# Altium PCB 02-00037-000.PcbDoc (part 1 of 2)
Units mm, origin at the board's own origin, x right, y up, seen from the top; angles counter-clockwise.
Board outline 55.7 x 52.44 mm, 2 copper layers (L1_TOP, L2_BOTTOM), stack 0.71 mm thick; 73 components, 59 nets, 225 pads, 11 vias.
Unrouted connection lines stored in the file: 130.
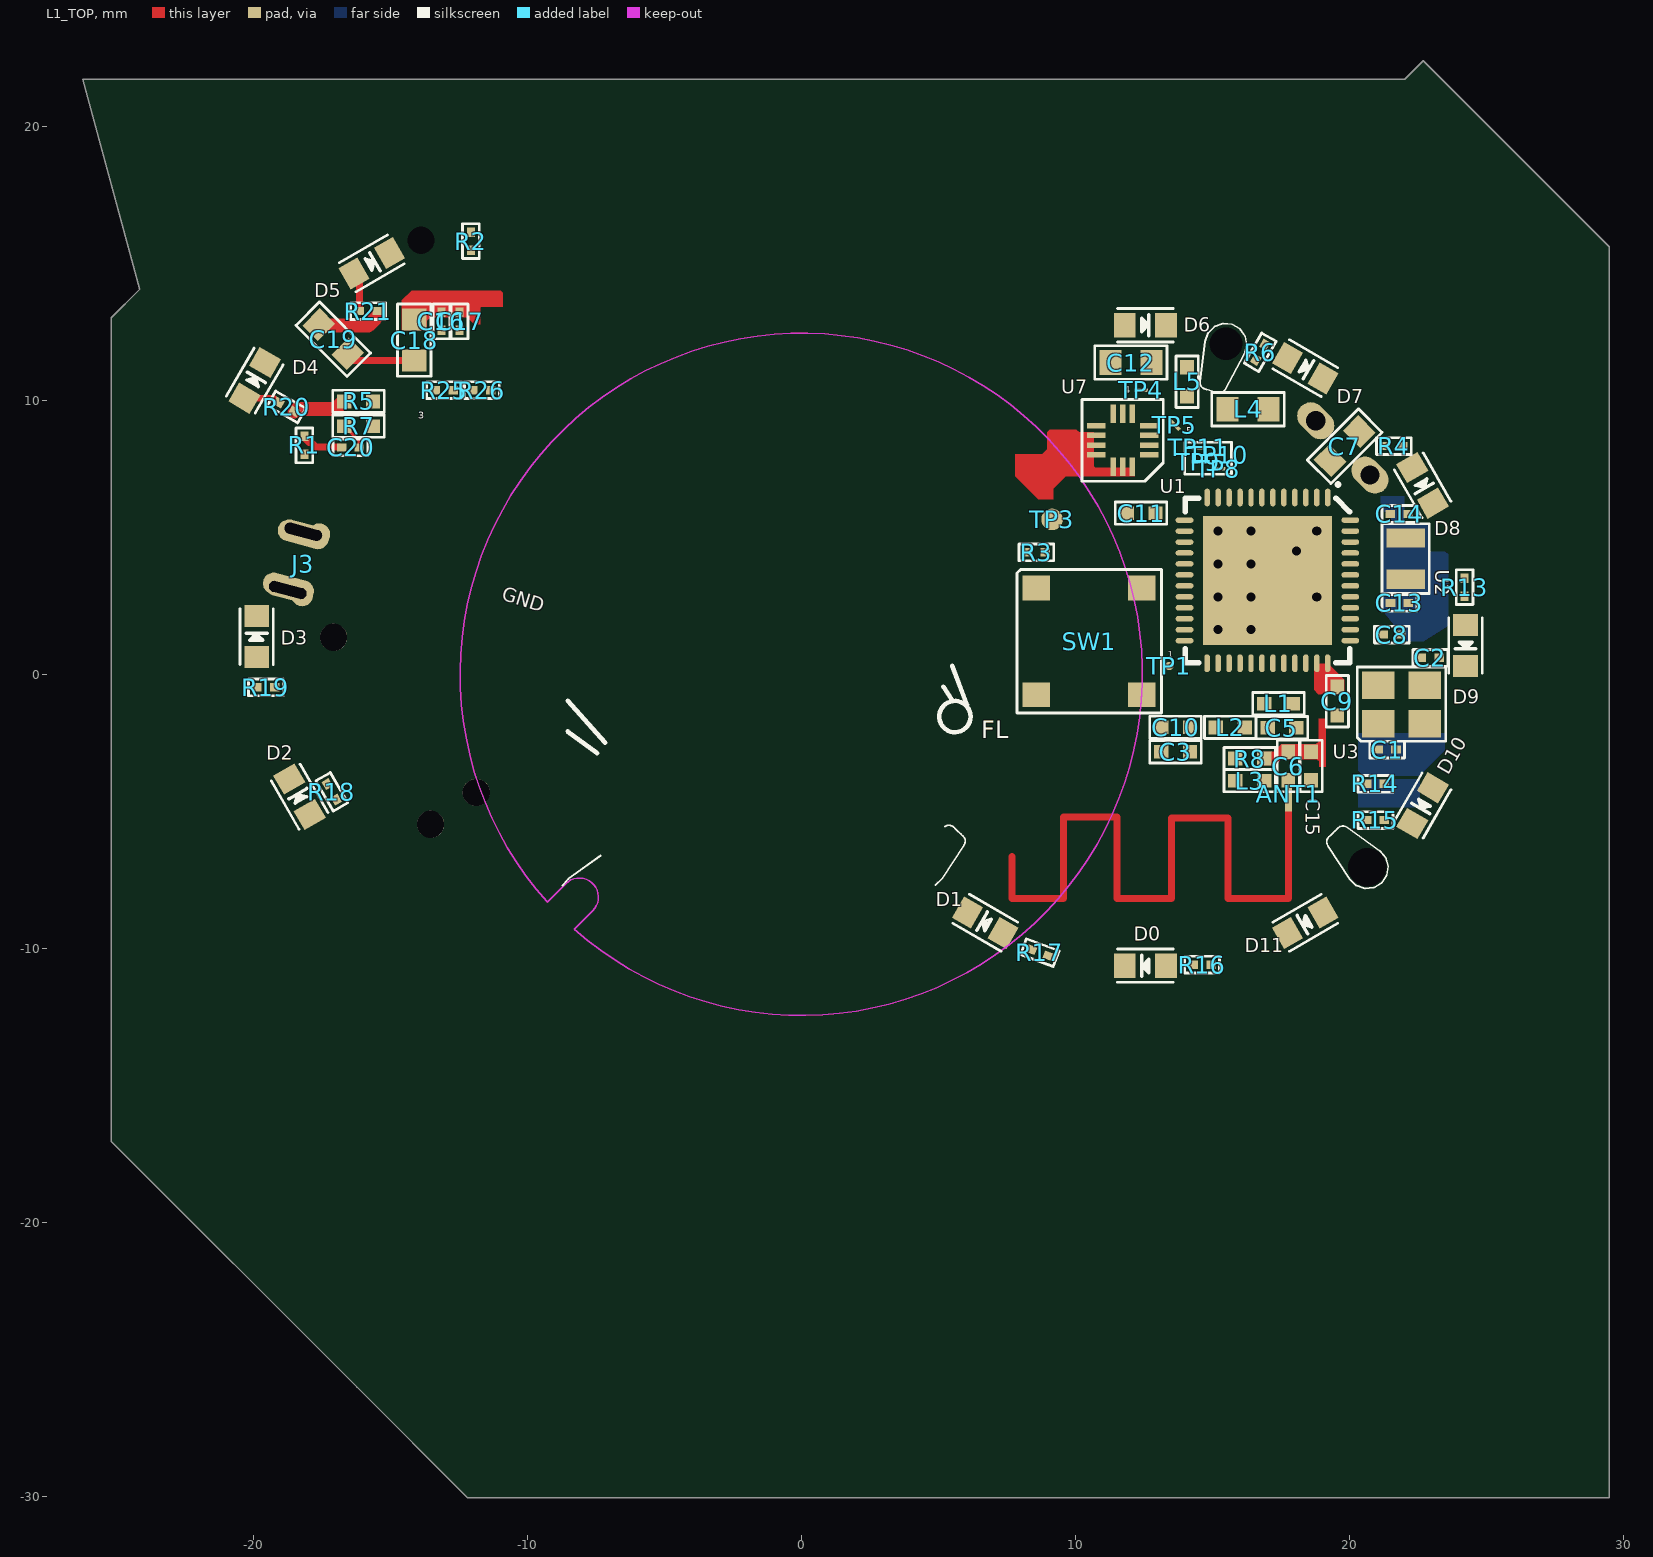
[diagram p0: L1_TOP view]
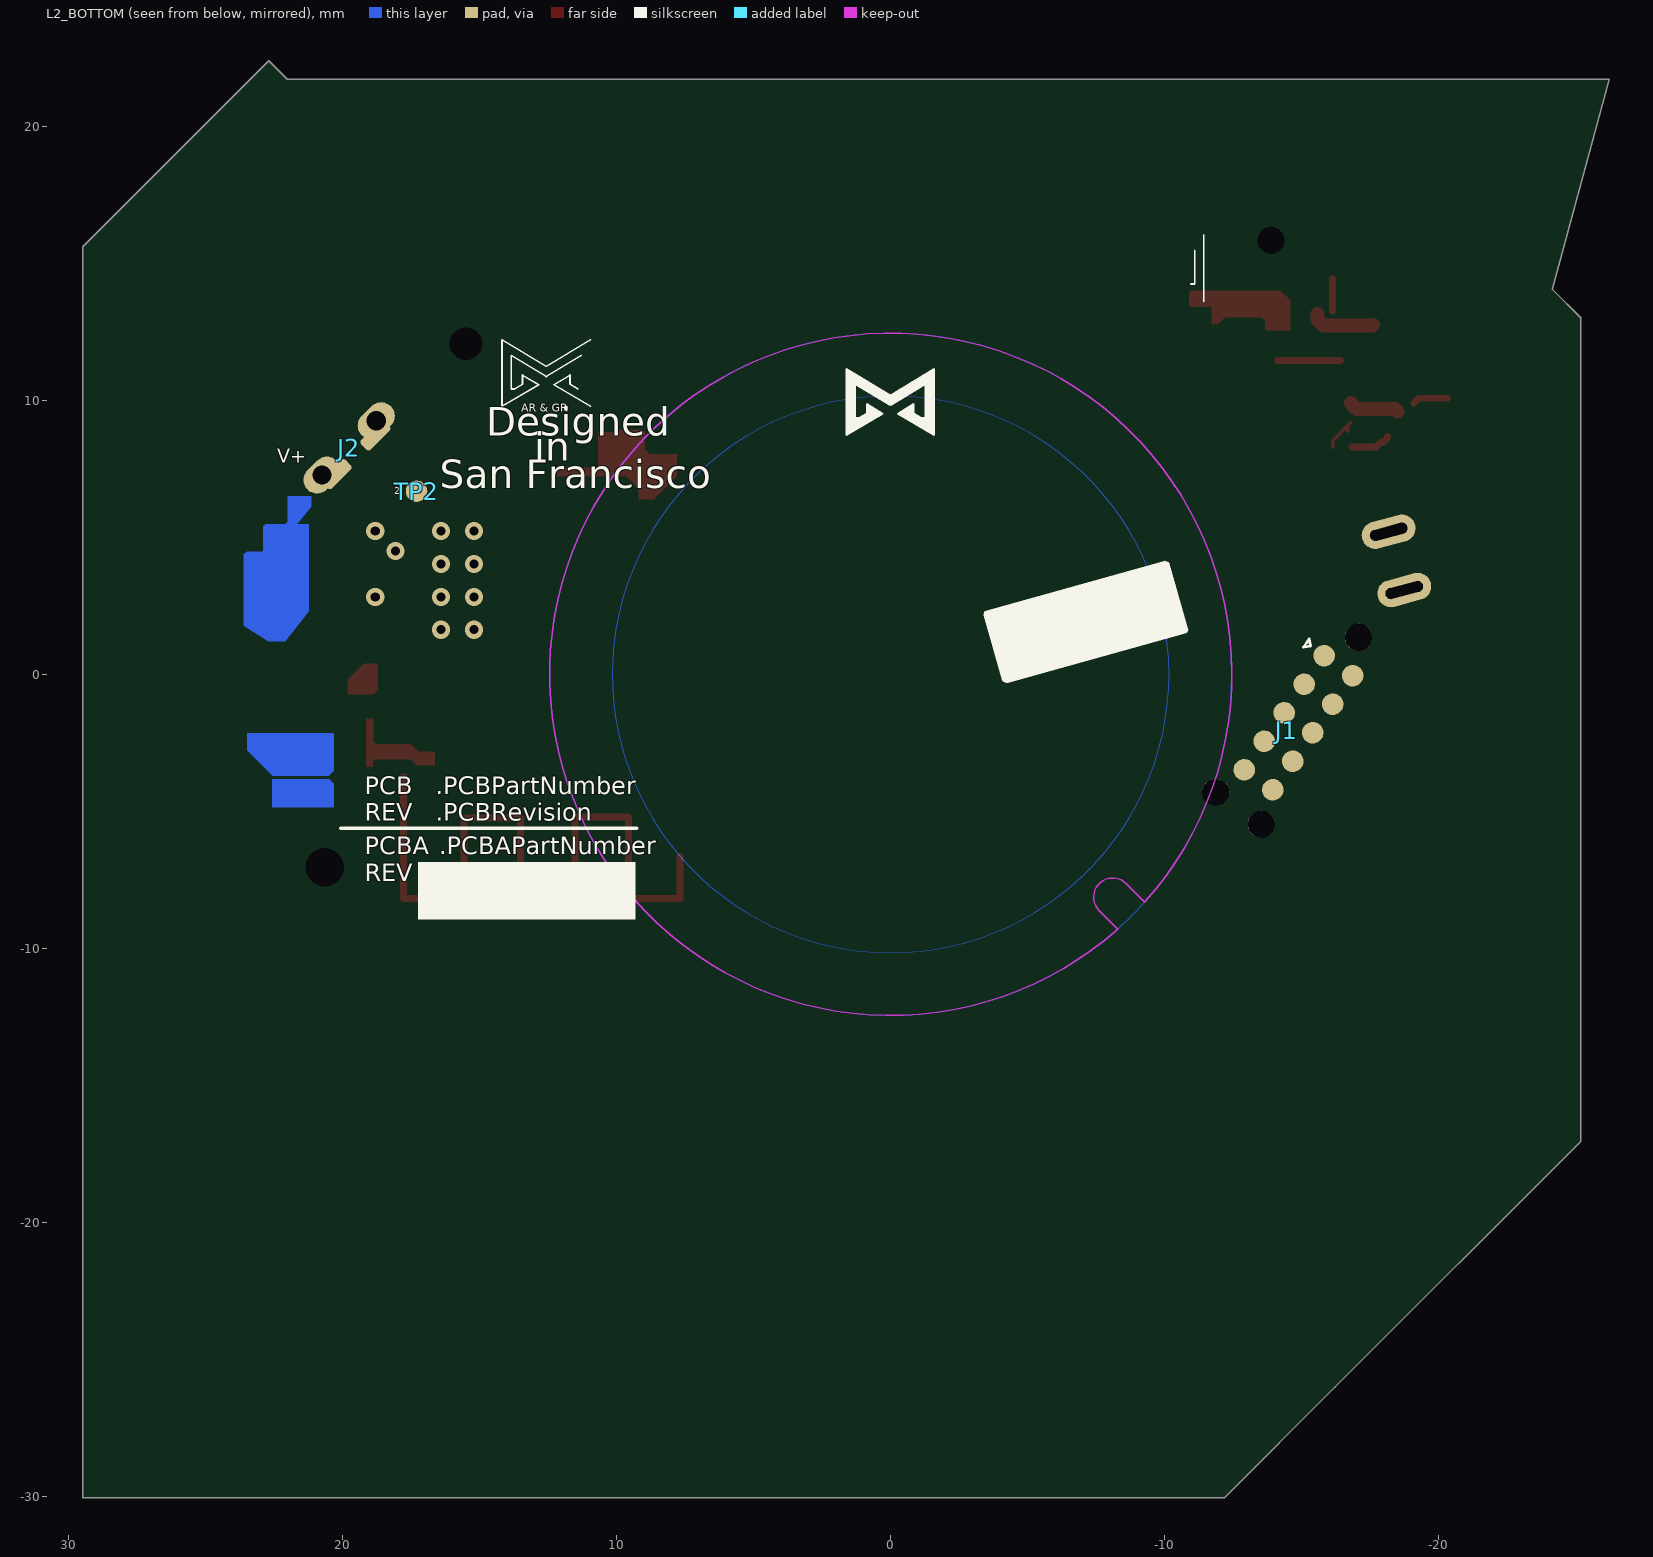
[diagram p1: L2_BOTTOM view, seen from below]

## Layer stack, top to bottom
L1_TOP: signal copper 0.0175
Dielectric: core 0.675, FR-4, Dk 4.3
L2_BOTTOM: signal copper 0.0175

## Board outline
-24.149,14.046 -25.184,13.011 -25.184,-11.189 -25.184,-17.043 -16.218,-26.01 -12.173,-30.055 29.483,-30.055 29.483,15.602 22.695,22.39 22.022,21.717 -26.219,21.717

## Design rules (kind name [scope] priority, off if disabled: settings)
Clearance "Custom Polygon Clearance" [InPolygon] p1: gap=0.127
Clearance "Via and Pad" [IsSMTPin vs IsVia] p2 off: gap=0.127
Clearance NetTieClearance [IsNetTieComponent] p3: gap=0.127
Clearance Polygon [InNamedPolygon('L1_TOP-GND') OR InNamedPolygon('L3_POWER-GND') or InNamedPolygon('L4_BOTTOM-GND')or InNamedPolygon('BUCK_OUT')] p4: gap=0.178
Clearance "'Default' PADS rule_24" [IsSMTPin vs IsSMTPin] p5: gap=0.152
Clearance "'Default' PADS rule_23" [IsThruPin vs IsSMTPin] p6: gap=0.152
Clearance "'Default' PADS rule_22" [IsSMTPin vs IsThruPin] p7: gap=0.152
Clearance "'Default' PADS rule_1" [IsVia vs IsSMTPin] p8: gap=0.127
Clearance "'Default' PADS rule_20" [IsSMTPin vs IsVia] p9: gap=0.102
Clearance "'Default' PADS rule_18" [IsThruPin vs IsThruPin] p10: gap=0.152
Clearance "'Default' PADS rule_17" [IsVia vs IsThruPin] p11: gap=0.152
Clearance "'Default' PADS rule_16" [IsThruPin vs IsVia] p12: gap=0.152
Clearance "BGA Escape" [IsSMTPin] p13: gap=0.127
Clearance "Via Trace Clearance" [IsVia] p14: gap=0.127
Clearance "'Default' PADS rule_15" [All] p15: gap=0.127
ComponentClearance "'Default' PADS rule_12" [All] p1: gap=0 collisioncheckmode=3 verticalgap=0.254 showdistances=FALSE
FlightTimeFalling "'Default' PADS rule_10" [All] p1: maximum=10.00
FlightTimeRising "'Default' PADS rule_9" [All] p1: maximum=10.00
Length "'Default' PADS rule_5" [All] p1: maxlimit=1270 minlimit=0
MaxMinImpedance "'Default' PADS rule_8" [All] p1: minimum=50.00 maximum=150.0
MinimumSolderMaskSliver [All] p1: minsoldermaskwidth=0.051
ParallelSegment "'Default' PADS rule_7" [All] p1: limit=25.4 gap=5.08
ParallelSegment "'Default' PADS rule_6" [All] p2: limit=25.4 gap=5.08
PlaneClearance "'Default' PADS rule_14" [All] p1: clearance=0.15
PlaneConnect "Through Pin Connect" [IsThruPin] p1: planeconnectstyle=Relief reliefexpansion=0.254 reliefentries=4 reliefconductorwidth=0.508 reliefairgap=0.254
PlaneConnect "Power Plane Connect Style - Via from round thru-hole global defaults" [IsVia] p2: planeconnectstyle=Direct reliefexpansion=0.508 reliefentries=4 reliefconductorwidth=0.381 reliefairgap=0.254
PlaneConnect "Power Plane Connect Style - Round thru-hole pad from global defaults" [IsPad And OnMultiLayer And (PadShape_MidLayer1 = 'Round') And (PadXSize_MidLayer1 = PadYSize_MidLayer1)] p3: planeconnectstyle=Direct reliefexpansion=0.508 reliefentries=4 reliefconductorwidth=0.381 reliefairgap=0.254
PlaneConnect "Power Plane Connect Style - Square thru-hole pad from global defaults" [IsPad And OnMultiLayer And ((PadShape_MidLayer1 = 'Rectangular') Or (PadShape_MidLayer1 = 'Octagonal') Or (PadShape_MidLayer1 = 'Rounded Rectangle')) And (PadXSize_MidLayer1 = PadYSize_MidLayer1)] p4: planeconnectstyle=Direct reliefexpansion=0.508 reliefentries=4 reliefconductorwidth=0.381 reliefairgap=0.254
PlaneConnect "Power Plane Connect Style - Rect thru-hole pad from global defaults" [IsPad And OnMultiLayer And ((PadShape_MidLayer1 = 'Rectangular') Or (PadShape_MidLayer1 = 'Octagonal') Or (PadShape_MidLayer1 = 'Rounded Rectangle')) And (PadXSize_MidLayer1 <> PadYSize_MidLayer1)] p5: planeconnectstyle=Direct reliefexpansion=0.508 reliefentries=4 reliefconductorwidth=0.381 reliefairgap=0.254
PlaneConnect "Power Plane Connect Style - Square-rect thru-hole pad from global defaults" [IsPad And OnMultiLayer And (PadShape_MidLayer1 = 'Rounded Rectangle') And (PadXSize_MidLayer1 = PadYSize_MidLayer1) And (Pad_CornerRadius_MidLayer1 = '0%')] p6: planeconnectstyle=Direct reliefexpansion=0.508 reliefentries=4 reliefconductorwidth=0.381 reliefairgap=0.254
PlaneConnect "Power Plane Connect Style - Oval thru-hole pad from global defaults" [IsPad And OnMultiLayer And (PadShape_MidLayer1 = 'Round') And (PadXSize_MidLayer1 <> PadYSize_MidLayer1)] p7: planeconnectstyle=Direct reliefexpansion=0.508 reliefentries=4 reliefconductorwidth=0.381 reliefairgap=0.254
PlaneConnect "Power Plane Connect Style - Round-oval thru-hole pad from global defaults" [IsPad And OnMultiLayer And (PadShape_MidLayer1 = 'Rounded Rectangle') And (PadXSize_MidLayer1 = PadYSize_MidLayer1) And (Pad_CornerRadius_MidLayer1 = '100%')] p8: planeconnectstyle=Direct reliefexpansion=0.508 reliefentries=4 reliefconductorwidth=0.381 reliefairgap=0.254
PolygonConnect PolygonConnect_1 [IsThruPin] p1: connectstyle=Relief reliefconductorwidth=0.254 reliefentries=4 polygonreliefangle="45 Angle" airgapwidth=0.254
PolygonConnect "Polygon Connect Style - L4_BOTTOM Round SMD from global defaults" [IsSMTPin And (PadShape_BottomLayer = 'Round') And (PadXSize_BottomLayer = PADYSize_BottomLayer) vs Layer = 'L4_BOTTOM'] p2: connectstyle=Direct reliefconductorwidth=0.381 reliefentries=4 polygonreliefangle="45 Angle" airgapwidth=0.254
PolygonConnect "Polygon Connect Style - L1_TOP Round SMD from global defaults" [IsSMTPin And (PadShape_TopLayer = 'Round') And (PadXSize_TopLayer = PADYSize_TopLayer) vs Layer = 'L1_TOP'] p3: connectstyle=Direct reliefconductorwidth=0.381 reliefentries=4 polygonreliefangle="45 Angle" airgapwidth=0.254
PolygonConnect "Polygon Connect Style - L4_BOTTOM Square SMD from global defaults 1" [IsSMTPin And (PadShape_BottomLayer = 'Rectangular') And (PadXSize_BottomLayer = PADYSize_BottomLayer) vs Layer = 'L4_BOTTOM'] p4: connectstyle=Direct reliefconductorwidth=0.381 reliefentries=4 polygonreliefangle="45 Angle" airgapwidth=0.254
PolygonConnect "Polygon Connect Style - L4_BOTTOM Square SMD from global defaults 2" [IsSMTPin And (PadShape_BottomLayer = 'Octagonal') And (PadXSize_BottomLayer = PADYSize_BottomLayer) vs Layer = 'L4_BOTTOM'] p5: connectstyle=Direct reliefconductorwidth=0.381 reliefentries=4 polygonreliefangle="45 Angle" airgapwidth=0.254
PolygonConnect "Polygon Connect Style - L4_BOTTOM Square SMD from global defaults 3" [IsSMTPin And (PadShape_BottomLayer = 'Rounded Rectangle') And (PadXSize_BottomLayer = PADYSize_BottomLayer) vs Layer = 'L4_BOTTOM'] p6: connectstyle=Direct reliefconductorwidth=0.381 reliefentries=4 polygonreliefangle="45 Angle" airgapwidth=0.254
PolygonConnect "Polygon Connect Style - L1_TOP Square SMD from global defaults 1" [IsSMTPin And (PadShape_TopLayer = 'Rectangular') And (PadXSize_TopLayer = PADYSize_TopLayer) vs Layer = 'L1_TOP'] p7: connectstyle=Direct reliefconductorwidth=0.381 reliefentries=4 polygonreliefangle="45 Angle" airgapwidth=0.254
PolygonConnect "Polygon Connect Style - L1_TOP Square SMD from global defaults 2" [IsSMTPin And (PadShape_TopLayer = 'Octagonal') And (PadXSize_TopLayer = PADYSize_TopLayer) vs Layer = 'L1_TOP'] p8: connectstyle=Direct reliefconductorwidth=0.381 reliefentries=4 polygonreliefangle="45 Angle" airgapwidth=0.254
PolygonConnect "Polygon Connect Style - L1_TOP Square SMD from global defaults 3" [IsSMTPin And (PadShape_TopLayer = 'Rounded Rectangle') And (PadXSize_TopLayer = PADYSize_TopLayer) vs Layer = 'L1_TOP'] p9: connectstyle=Direct reliefconductorwidth=0.381 reliefentries=4 polygonreliefangle="45 Angle" airgapwidth=0.254
PolygonConnect "Polygon Connect Style - L4_BOTTOM Rect SMD from global defaults 1" [IsSMTPin And (PadShape_BottomLayer = 'Rectangular') And (PadXSize_BottomLayer <> PADYSize_BottomLayer) vs Layer = 'L4_BOTTOM'] p10: connectstyle=Direct reliefconductorwidth=0.381 reliefentries=4 polygonreliefangle="45 Angle" airgapwidth=0.254
PolygonConnect "Polygon Connect Style - L4_BOTTOM Rect SMD from global defaults 2" [IsSMTPin And (PadShape_BottomLayer = 'Octagonal') And (PadXSize_BottomLayer <> PADYSize_BottomLayer) vs Layer = 'L4_BOTTOM'] p11: connectstyle=Direct reliefconductorwidth=0.381 reliefentries=4 polygonreliefangle="45 Angle" airgapwidth=0.254
PolygonConnect "Polygon Connect Style - L4_BOTTOM Rect SMD from global defaults 3" [IsSMTPin And (PadShape_BottomLayer = 'Rounded Rectangle') And (PadXSize_BottomLayer <> PADYSize_BottomLayer) vs Layer = 'L4_BOTTOM'] p12: connectstyle=Direct reliefconductorwidth=0.381 reliefentries=4 polygonreliefangle="45 Angle" airgapwidth=0.254
PolygonConnect "Polygon Connect Style - L4_BOTTOM Square-rect SMD pad from global defaults" [IsSMTPin And (PadShape_BottomLayer = 'Rounded Rectangle') And (PadXSize_BottomLayer = PADYSize_BottomLayer) And (Pad_CornerRadius_BottomLayer = '0%') vs Layer = 'L4_BOTTOM'] p13: connectstyle=Direct reliefconductorwidth=0.381 reliefentries=4 polygonreliefangle="45 Angle" airgapwidth=0.254
PolygonConnect "Polygon Connect Style - L1_TOP Rect SMD from global defaults 1" [IsSMTPin And (PadShape_TopLayer = 'Rectangular') And (PadXSize_TopLayer <> PADYSize_TopLayer) vs Layer = 'L1_TOP'] p14: connectstyle=Relief reliefconductorwidth=0.127 reliefentries=4 polygonreliefangle="90 Angle" airgapwidth=0.127
PolygonConnect "Polygon Connect Style - L1_TOP Rect SMD from global defaults 2" [IsSMTPin And (PadShape_TopLayer = 'Octagonal') And (PadXSize_TopLayer <> PADYSize_TopLayer) vs Layer = 'L1_TOP'] p15: connectstyle=Direct reliefconductorwidth=0.381 reliefentries=4 polygonreliefangle="45 Angle" airgapwidth=0.254
PolygonConnect "Polygon Connect Style - L1_TOP Rect SMD from global defaults 3" [IsSMTPin And (PadShape_TopLayer = 'Rounded Rectangle') And (PadXSize_TopLayer <> PADYSize_TopLayer) vs Layer = 'L1_TOP'] p16: connectstyle=Direct reliefconductorwidth=0.381 reliefentries=4 polygonreliefangle="45 Angle" airgapwidth=0.254
PolygonConnect "Polygon Connect Style - L1_TOP Square-rect SMD pad from global defaults" [IsSMTPin And (PadShape_TopLayer = 'Rounded Rectangle') And (PadXSize_TopLayer = PADYSize_TopLayer) And (Pad_CornerRadius_TopLayer = '0%') vs Layer = 'L1_TOP'] p17: connectstyle=Direct reliefconductorwidth=0.381 reliefentries=4 polygonreliefangle="45 Angle" airgapwidth=0.254
PolygonConnect "Polygon Connect Style - L4_BOTTOM Oval SMD from global defaults" [IsSMTPin And (PadShape_BottomLayer = 'Round') And (PadXSize_BottomLayer <> PADYSize_BottomLayer) vs Layer = 'L4_BOTTOM'] p18: connectstyle=Direct reliefconductorwidth=0.381 reliefentries=4 polygonreliefangle="45 Angle" airgapwidth=0.254
PolygonConnect "Polygon Connect Style - L4_BOTTOM Round-oval SMD pad from global defaults" [IsSMTPin And (PadShape_BottomLayer = 'Rounded Rectangle') And (PadXSize_BottomLayer = PADYSize_BottomLayer) And (Pad_CornerRadius_BottomLayer = '100%') vs Layer = 'L4_BOTTOM'] p19: connectstyle=Direct reliefconductorwidth=0.381 reliefentries=4 polygonreliefangle="45 Angle" airgapwidth=0.254
PolygonConnect "Polygon Connect Style - L1_TOP Oval SMD from global defaults" [IsSMTPin And (PadShape_TopLayer = 'Round') And (PadXSize_TopLayer <> PADYSize_TopLayer) vs Layer = 'L1_TOP'] p20: connectstyle=Direct reliefconductorwidth=0.381 reliefentries=4 polygonreliefangle="45 Angle" airgapwidth=0.254
PolygonConnect "Polygon Connect Style - L1_TOP Round-oval SMD pad from global defaults" [IsSMTPin And (PadShape_TopLayer = 'Rounded Rectangle') And (PadXSize_TopLayer = PADYSize_TopLayer) And (Pad_CornerRadius_TopLayer = '100%') vs Layer = 'L1_TOP'] p21: connectstyle=Direct reliefconductorwidth=0.381 reliefentries=4 polygonreliefangle="45 Angle" airgapwidth=0.254
PolygonConnect "Polygon Connect Style - Via from round thru-hole global defaults_28" [IsVia] p22: connectstyle=Direct reliefconductorwidth=0.381 reliefentries=4 polygonreliefangle="45 Angle" airgapwidth=0.254
PolygonConnect "Polygon Connect Style - L4_BOTTOM Round thru-hole pad from global defaults" [IsPad And OnMultiLayer And (PadShape_BottomLayer = 'Round') And (PadXSize_BottomLayer = PADYSize_BottomLayer) vs Layer = 'L4_BOTTOM'] p23: connectstyle=Direct reliefconductorwidth=0.381 reliefentries=4 polygonreliefangle="45 Angle" airgapwidth=0.254
PolygonConnect "Polygon Connect Style - Via from round thru-hole global defaults_27" [IsVia] p24: connectstyle=Direct reliefconductorwidth=0.381 reliefentries=4 polygonreliefangle="45 Angle" airgapwidth=0.254
PolygonConnect "Polygon Connect Style - L3_POWER Round thru-hole pad from global defaults" [IsPad And OnMultiLayer And (PadShape_MidLayer2 = 'Round') And (PadXSize_MidLayer2 = PADYSize_MidLayer2) vs Layer = 'L3_POWER'] p25: connectstyle=Direct reliefconductorwidth=0.381 reliefentries=4 polygonreliefangle="45 Angle" airgapwidth=0.254
PolygonConnect "Polygon Connect Style - Via from round thru-hole global defaults_26" [IsVia] p26: connectstyle=Direct reliefconductorwidth=0.381 reliefentries=4 polygonreliefangle="45 Angle" airgapwidth=0.254
PolygonConnect "Polygon Connect Style - L2_GND Round thru-hole pad from global defaults" [IsPad And OnMultiLayer And (PadShape_MidLayer1 = 'Round') And (PadXSize_MidLayer1 = PADYSize_MidLayer1) vs Layer = 'L2_GND'] p27: connectstyle=Direct reliefconductorwidth=0.381 reliefentries=4 polygonreliefangle="45 Angle" airgapwidth=0.254
PolygonConnect "Polygon Connect Style - Via from round thru-hole global defaults" [IsVia] p28: connectstyle=Direct reliefconductorwidth=0.381 reliefentries=4 polygonreliefangle="45 Angle" airgapwidth=0.254
PolygonConnect "Polygon Connect Style - L1_TOP Round thru-hole pad from global defaults" [IsPad And OnMultiLayer And (PadShape_TopLayer = 'Round') And (PadXSize_TopLayer = PADYSize_TopLayer) vs Layer = 'L1_TOP'] p29: connectstyle=Direct reliefconductorwidth=0.381 reliefentries=4 polygonreliefangle="45 Angle" airgapwidth=0.254
PolygonConnect "Polygon Connect Style - L4_BOTTOM Square thru-hole pad from global defaults" [IsPad And OnMultiLayer And ((PadShape_BottomLayer = 'Rectangular') Or (PadShape_BottomLayer = 'Octagonal') Or (PadShape_BottomLayer = 'Rounded Rectangle')) And (PadXSize_BottomLayer = PADYSize_BottomLayer) vs Layer = 'L4_BOTTOM'] p30: connectstyle=Direct reliefconductorwidth=0.381 reliefentries=4 polygonreliefangle="45 Angle" airgapwidth=0.254
PolygonConnect "Polygon Connect Style - L3_POWER Square thru-hole pad from global defaults" [IsPad And OnMultiLayer And ((PadShape_MidLayer2 = 'Rectangular') Or (PadShape_MidLayer2 = 'Octagonal') Or (PadShape_MidLayer2 = 'Rounded Rectangle')) And (PadXSize_MidLayer2 = PADYSize_MidLayer2) vs Layer = 'L3_POWER'] p31: connectstyle=Direct reliefconductorwidth=0.381 reliefentries=4 polygonreliefangle="45 Angle" airgapwidth=0.254
PolygonConnect "Polygon Connect Style - L2_GND Square thru-hole pad from global defaults" [IsPad And OnMultiLayer And ((PadShape_MidLayer1 = 'Rectangular') Or (PadShape_MidLayer1 = 'Octagonal') Or (PadShape_MidLayer1 = 'Rounded Rectangle')) And (PadXSize_MidLayer1 = PADYSize_MidLayer1) vs Layer = 'L2_GND'] p32: connectstyle=Direct reliefconductorwidth=0.381 reliefentries=4 polygonreliefangle="45 Angle" airgapwidth=0.254
PolygonConnect "Polygon Connect Style - L1_TOP Square thru-hole pad from global defaults" [IsPad And OnMultiLayer And ((PadShape_TopLayer = 'Rectangular') Or (PadShape_TopLayer = 'Octagonal') Or (PadShape_TopLayer = 'Rounded Rectangle')) And (PadXSize_TopLayer = PADYSize_TopLayer) vs Layer = 'L1_TOP'] p33: connectstyle=Direct reliefconductorwidth=0.381 reliefentries=4 polygonreliefangle="45 Angle" airgapwidth=0.254
PolygonConnect "Polygon Connect Style - L4_BOTTOM Rect thru-hole pad from global defaults" [IsPad And OnMultiLayer And ((PadShape_BottomLayer = 'Rectangular') Or (PadShape_BottomLayer = 'Octagonal') Or (PadShape_BottomLayer = 'Rounded Rectangle')) And (PadXSize_BottomLayer <> PADYSize_BottomLayer) vs Layer = 'L4_BOTTOM'] p34: connectstyle=Direct reliefconductorwidth=0.381 reliefentries=4 polygonreliefangle="45 Angle" airgapwidth=0.254
PolygonConnect "Polygon Connect Style - L4_BOTTOM Square-rect thru-hole pad from global defaults" [IsPad And OnMultiLayer And (PadShape_BottomLayer = 'Rounded Rectangle') And (PadXSize_BottomLayer = PADYSize_BottomLayer) And (Pad_CornerRadius_BottomLayer = '0%') vs Layer = 'L4_BOTTOM'] p35: connectstyle=Direct reliefconductorwidth=0.381 reliefentries=4 polygonreliefangle="45 Angle" airgapwidth=0.254
PolygonConnect "Polygon Connect Style - L3_POWER Rect thru-hole pad from global defaults" [IsPad And OnMultiLayer And ((PadShape_MidLayer2 = 'Rectangular') Or (PadShape_MidLayer2 = 'Octagonal') Or (PadShape_MidLayer2 = 'Rounded Rectangle')) And (PadXSize_MidLayer2 <> PADYSize_MidLayer2) vs Layer = 'L3_POWER'] p36: connectstyle=Direct reliefconductorwidth=0.381 reliefentries=4 polygonreliefangle="45 Angle" airgapwidth=0.254
PolygonConnect "Polygon Connect Style - L3_POWER Square-rect thru-hole pad from global defaults" [IsPad And OnMultiLayer And (PadShape_MidLayer2 = 'Rounded Rectangle') And (PadXSize_MidLayer2 = PADYSize_MidLayer2) And (Pad_CornerRadius_MidLayer2 = '0%') vs Layer = 'L3_POWER'] p37: connectstyle=Direct reliefconductorwidth=0.381 reliefentries=4 polygonreliefangle="45 Angle" airgapwidth=0.254
PolygonConnect "Polygon Connect Style - L2_GND Rect thru-hole pad from global defaults" [IsPad And OnMultiLayer And ((PadShape_MidLayer1 = 'Rectangular') Or (PadShape_MidLayer1 = 'Octagonal') Or (PadShape_MidLayer1 = 'Rounded Rectangle')) And (PadXSize_MidLayer1 <> PADYSize_MidLayer1) vs Layer = 'L2_GND'] p38: connectstyle=Direct reliefconductorwidth=0.381 reliefentries=4 polygonreliefangle="45 Angle" airgapwidth=0.254
PolygonConnect "Polygon Connect Style - L2_GND Square-rect thru-hole pad from global defaults" [IsPad And OnMultiLayer And (PadShape_MidLayer1 = 'Rounded Rectangle') And (PadXSize_MidLayer1 = PADYSize_MidLayer1) And (Pad_CornerRadius_MidLayer1 = '0%') vs Layer = 'L2_GND'] p39: connectstyle=Direct reliefconductorwidth=0.381 reliefentries=4 polygonreliefangle="45 Angle" airgapwidth=0.254
PolygonConnect "Polygon Connect Style - L1_TOP Rect thru-hole pad from global defaults" [IsPad And OnMultiLayer And ((PadShape_TopLayer = 'Rectangular') Or (PadShape_TopLayer = 'Octagonal') Or (PadShape_TopLayer = 'Rounded Rectangle')) And (PadXSize_TopLayer <> PADYSize_TopLayer) vs Layer = 'L1_TOP'] p40: connectstyle=Direct reliefconductorwidth=0.381 reliefentries=4 polygonreliefangle="45 Angle" airgapwidth=0.254
PolygonConnect "Polygon Connect Style - L1_TOP Square-rect thru-hole pad from global defaults" [IsPad And OnMultiLayer And (PadShape_TopLayer = 'Rounded Rectangle') And (PadXSize_TopLayer = PADYSize_TopLayer) And (Pad_CornerRadius_TopLayer = '0%') vs Layer = 'L1_TOP'] p41: connectstyle=Direct reliefconductorwidth=0.381 reliefentries=4 polygonreliefangle="45 Angle" airgapwidth=0.254
PolygonConnect "Polygon Connect Style - L4_BOTTOM Oval thru-hole pad from global defaults" [IsPad And OnMultiLayer And (PadShape_BottomLayer = 'Round') And (PadXSize_BottomLayer <> PADYSize_BottomLayer) vs Layer = 'L4_BOTTOM'] p42: connectstyle=Direct reliefconductorwidth=0.381 reliefentries=4 polygonreliefangle="45 Angle" airgapwidth=0.254
PolygonConnect "Polygon Connect Style - L4_BOTTOM Round-oval thru-hole pad from global defaults" [IsPad And OnMultiLayer And (PadShape_BottomLayer = 'Rounded Rectangle') And (PadXSize_BottomLayer = PADYSize_BottomLayer) And (Pad_CornerRadius_BottomLayer = '100%') vs Layer = 'L4_BOTTOM'] p43: connectstyle=Direct reliefconductorwidth=0.381 reliefentries=4 polygonreliefangle="45 Angle" airgapwidth=0.254
PolygonConnect "Polygon Connect Style - L3_POWER Oval thru-hole pad from global defaults" [IsPad And OnMultiLayer And (PadShape_MidLayer2 = 'Round') And (PadXSize_MidLayer2 <> PADYSize_MidLayer2) vs Layer = 'L3_POWER'] p44: connectstyle=Direct reliefconductorwidth=0.381 reliefentries=4 polygonreliefangle="45 Angle" airgapwidth=0.254
PolygonConnect "Polygon Connect Style - L3_POWER Round-oval thru-hole pad from global defaults" [IsPad And OnMultiLayer And (PadShape_MidLayer2 = 'Rounded Rectangle') And (PadXSize_MidLayer2 = PADYSize_MidLayer2) And (Pad_CornerRadius_MidLayer2 = '100%') vs Layer = 'L3_POWER'] p45: connectstyle=Direct reliefconductorwidth=0.381 reliefentries=4 polygonreliefangle="45 Angle" airgapwidth=0.254
PolygonConnect "Polygon Connect Style - L2_GND Oval thru-hole pad from global defaults" [IsPad And OnMultiLayer And (PadShape_MidLayer1 = 'Round') And (PadXSize_MidLayer1 <> PADYSize_MidLayer1) vs Layer = 'L2_GND'] p46: connectstyle=Direct reliefconductorwidth=0.381 reliefentries=4 polygonreliefangle="45 Angle" airgapwidth=0.254
PolygonConnect "Polygon Connect Style - L2_GND Round-oval thru-hole pad from global defaults" [IsPad And OnMultiLayer And (PadShape_MidLayer1 = 'Rounded Rectangle') And (PadXSize_MidLayer1 = PADYSize_MidLayer1) And (Pad_CornerRadius_MidLayer1 = '100%') vs Layer = 'L2_GND'] p47: connectstyle=Direct reliefconductorwidth=0.381 reliefentries=4 polygonreliefangle="45 Angle" airgapwidth=0.254
PolygonConnect "Polygon Connect Style - L1_TOP Oval thru-hole pad from global defaults" [IsPad And OnMultiLayer And (PadShape_TopLayer = 'Round') And (PadXSize_TopLayer <> PADYSize_TopLayer) vs Layer = 'L1_TOP'] p48: connectstyle=Direct reliefconductorwidth=0.381 reliefentries=4 polygonreliefangle="45 Angle" airgapwidth=0.254
PolygonConnect "Polygon Connect Style - L1_TOP Round-oval thru-hole pad from global defaults" [IsPad And OnMultiLayer And (PadShape_TopLayer = 'Rounded Rectangle') And (PadXSize_TopLayer = PADYSize_TopLayer) And (Pad_CornerRadius_TopLayer = '100%') vs Layer = 'L1_TOP'] p49: connectstyle=Direct reliefconductorwidth=0.381 reliefentries=4 polygonreliefangle="45 Angle" airgapwidth=0.254
PolygonConnect [All] p50: connectstyle=Relief reliefconductorwidth=0.254 reliefentries=4 polygonreliefangle="90 Angle" airgapwidth=0.254
RoutingLayers "'Default' PADS rule_3" [All] p1: top layer_v5=TRUE bottom layer_v5=TRUE
RoutingPriority "'Default' PADS rule_2" [All] p1: routingpriority=3
RoutingTopology "'Default' PADS rule" [All] p1: topology=Shortest
RoutingVias "'Default' PADS rule_4" [All] p1: holewidth=0.152 width=0.356 viastyle="Through Hole" minholewidth=0.102 minwidth=0.305 maxholewidth=0.508 maxwidth=0.61
SilkscreenOverComponentPads [All] p1: minsilkscreentomaskgap=0.051
SolderMaskExpansion "Solder Mask Expansion from CAM settings" [All] p1: expansion=0.064
Width "'Default' PADS rule_13" [All] p1: maxlimit=0.5 minlimit=0.075 preferedwidth=0.127
20 further rules are at their usual default settings.

## Classes and differential pairs
component class POWER: C19 J2 J3
component class SoC: ANT1 C1 C2 C3 C5 C6 C7 C8 C9 C10 C11 C12 C13 C14 C15 C20 L1 L2 L3 L4 L5 R1 R3 R5 R7 R8 R25 R26 SW1 TP1 TP2 TP3 U1 U2 U3
component class ACCEL: C16 C17 C18 TP4 TP5 TP8 TP9 TP10 TP11 U7
component class DEBUG_CONN: J1
component class LEDs: D0 D1 D2 D3 D4 D5 D6 D7 D8 D9 D10 D11 R2 R4 R6 R13 R14 R15 R16 R17 R18 R19 R20 R21
net class LED[11..0]: LED0 LED1 LED2 LED3 LED4 LED5 LED6 LED7 LED8 LED9 LED10 LED11

## Components (designator, comment, footprint, x,y, rotation, side; value= is the part's Value field where it differs from the comment)
ANT1 "Trace Antenna based on PCB400003" NORDIC_MEAND 17.034,-6.306 r90 top
C1 "CAP CER 12PF 25V 5% NP0 0201" CAPC0201(0603)_N 21.379,-2.746 r0 top
C2 "CAP CER 12PF 25V 5% NP0 0201" CAPC0201(0603)_N 22.954,0.604 r180 top
C3 "CAP CER 2200PF 50V 10% X7R 0402" CAPC0402(1005)_N 13.659,-2.828 r180 top
C5 "CAP CER 2.2PF 50V NP0 0402" CAPC0402(1005)_N 17.542,-1.946 r0 top
C6 "CAP CER 2.4PF 50V NP0 0402" CAPC0402(1005)_N 17.774,-3.346 r90 top
C7 "CAP CER 4.7UF 6.3V 10% X5R 0603" CAPC0603(1608)_N 19.829,8.329 r225 top
C8 "CAP CER 0.1UF 10V 10% X5R 0201" CAPC0201(0603)_N 21.554,1.454 r180 top
C9 "CAP CER 1000PF 50V 10% X7R 0402" CAPC0402(1005)_N 19.564,-0.978 r270 top
C10 "CAP CER 0.047UF 16V 10% X7R 0402" CAPC0402(1005)_N 13.659,-1.933 r180 top
C11 "CAP CER 0.1UF 16V 10% X7R 0402" CAPC0402(1005)_N 12.402,5.88 r0 top
C12 "CAP CER 1UF 16V 20% X7R 0603" CAPC0603(1608)_N 12.029,11.379 r0 top
C13 "CAP CER 15PF 25V 5% NP0 0201" CAPC0201(0603)_N 21.829,2.604 r180 top
C14 "CAP CER 15PF 25V 5% NP0 0201" CAPC0201(0603)_N 21.825,5.855 r0 top
C15 "CAP CER 0.7PF 50V NP0 0402" CAPC0402(1005)_N 18.604,-3.346 r270 top
C16 "CAP CER 0.1UF 10V 10% X5R 0201" CAPC0201(0603)_N -13.132,12.884 r90 top
C17 "CAP CER 0.1UF 10V 10% X5R 0201" CAPC0201(0603)_N -12.471,12.884 r270 top
C18 "CAP CER 10UF 6.3V 20% X5R 0603" CAPC0603(1608)_N -14.122,12.198 r270 top
C19 "CAP CER 10UF 6.3V 20% X5R 0603" CAPC0603(1608)_N -17.08,12.233 r135 top
C20 "CAP CER 10000PF 10V 10% X7R 0201" CAPC0201(0603)_N -16.45,8.283 r0 top
D0 "THIN LED 1.6X0.8MM 631NM RED 0.4MM" LEDC0603(1608)_N 12.554,-10.63 r180 top locked
D1 "THIN LED 1.6X0.8MM 631NM RED 0.4MM" LEDC0603(1608)_N 6.712,-9.065 r150 top locked
D2 "THIN LED 1.6X0.8MM 631NM RED 0.4MM" LEDC0603(1608)_N -18.31,-4.464 r120 top locked
D3 "THIN LED 1.6X0.8MM 631NM RED 0.4MM" LEDC0603(1608)_N -19.875,1.378 r90 top locked
D4 "THIN LED 1.6X0.8MM 631NM RED 0.4MM" LEDC0603(1608)_N -19.948,10.725 r60 top locked
D5 "THIN LED 1.6X0.8MM 631NM RED 0.4MM" LEDC0603(1608)_N -15.672,15.002 r30 top locked
D6 "THIN LED 1.6X0.8MM 631NM RED 0.4MM" LEDC0603(1608)_N 12.554,12.738 r0 top locked
D7 "THIN LED 1.6X0.8MM 631NM RED 0.4MM" LEDC0603(1608)_N 18.396,11.173 r330 top locked
D8 "THIN LED 1.6X0.8MM 631NM RED 0.4MM" LEDC0603(1608)_N 22.673,6.896 r300 top locked
D9 "THIN LED 1.6X0.8MM 631NM RED 0.4MM" LEDC0603(1608)_N 24.238,1.054 r270 top locked
D10 "THIN LED 1.6X0.8MM 631NM RED 0.4MM" LEDC0603(1608)_N 22.673,-4.788 r240 top locked
D11 "THIN LED 1.6X0.8MM 631NM RED 0.4MM" LEDC0603(1608)_N 18.396,-9.065 r210 top locked
J1 "Tag-Connect 10pin PCB mating contacts - Nordic Rev" TAG_CONNECT_10P -15.817,0.678 r305 bottom locked
J2 "Battery Contact Positive Low Profile" BATT_POS_SPUTNIK 19.764,8.264 r135 bottom locked
J3 "Coin Cell Battery Negative Contact" BATT_NEG -18.741,3.078 r75 bottom locked
L1 "INDUCTOR 4.7NH 160MA 0402" INDC0402(1005)_N 17.414,-1.071 r0 top
L2 "INDUCTOR 10NH 100MA 0402" INDC0402(1005)_N 15.656,-1.937 r0 top
L3 "INDUCTOR 1.5NH 280MA 0402" INDC0402(1005)_N 16.365,-3.88 r0 top
L4 "INDUCTOR 10UH 80MA 10% 0603" INDC0603(1608)_N 16.304,9.674 r0 top
L5 "INDUCTOR HI FREQ 15NH 5% 0402" INDC0402(1005)_N 14.079,10.679 r270 top
R1 "RES 12K OHM 1/20W 1% 0201 SMD" RESC0201(0603)_N -18.13,8.358 r90 top
R2 "RES 270 OHM 1/20W 5% 0201 SMD" RESC0201(0603)_N -12.055,15.808 r90 top
R3 "RES 510 OHM 1/20W 5% 0201 SMD" RESC0201(0603)_N 8.579,4.454 r0 top
R4 "RES 270 OHM 1/20W 5% 0201 SMD" RESC0201(0603)_N 21.624,8.333 r0 top
R5 "RES 1.60M OHM 1/16W 1% 0402 SMD" RESC0402(1005)_N -16.155,9.958 r0 top
R6 "RES 270 OHM 1/20W 5% 0201 SMD" RESC0201(0603)_N 16.754,11.754 r60 top
R7 "RES 1.60M OHM 1/16W 1% 0402 SMD" RESC0402(1005)_N -16.155,9.058 r0 top
R8 "RES 330 OHM 1/16W 5% 0402 SMD" RESC0402(1005)_N 16.369,-3.073 r180 top
R13 "RES 270 OHM 1/20W 5% 0201 SMD" RESC0201(0603)_N 24.204,3.179 r270 top
R14 "RES 270 OHM 1/20W 5% 0201 SMD" RESC0201(0603)_N 20.954,-3.996 r0 top
R15 "RES 270 OHM 1/20W 5% 0201 SMD" RESC0201(0603)_N 20.954,-5.316 r180 top
R16 "RES 270 OHM 1/20W 5% 0201 SMD" RESC0201(0603)_N 14.629,-10.596 r180 top
R17 "RES 270 OHM 1/20W 5% 0201 SMD" RESC0201(0603)_N 8.704,-10.156 r160 top
R18 "RES 270 OHM 1/20W 5% 0201 SMD" RESC0201(0603)_N -17.132,-4.286 r300 top
R19 "RES 270 OHM 1/20W 5% 0201 SMD" RESC0201(0603)_N -19.542,-0.472 r180 top
R20 "RES 270 OHM 1/20W 5% 0201 SMD" RESC0201(0603)_N -18.78,9.758 r150 top
R21 "RES 270 OHM 1/20W 5% 0201 SMD" RESC0201(0603)_N -15.805,13.258 r180 top
R25 "RES 1K OHM 1/20W 5% 0201 SMD" RESC0201(0603)_N -13.03,10.37 r180 top
R26 "RES 1K OHM 1/20W 5% 0201 SMD" RESC0201(0603)_N -11.659,10.37 r180 top
SW1 "SPST Switch 4.5mm" PTS530 10.504,1.204 r0 top locked
TP1 "12MIL SMT Test Point" SMT_TP_12MIL 13.429,0.304 r90 top
TP2 ".767mm SMT Test Point" SMT_TP_p767mm 17.284,6.684 r90 top
TP3 ".767mm SMT Test Point" SMT_TP_P767MM 9.154,5.654 r90 top
TP4 "TEST POINT 5MILx20MIL" SMT_TP_5milx20mil#1 12.402,10.354 r90 top
TP5 "TEST POINT 5MILx20MIL" SMT_TP_5milx20mil#2 13.629,9.104 r180 top
TP8 "TEST POINT 5MILx20MIL" SMT_TP_5milx20mil#3 15.114,7.464 r90 top
TP9 "TEST POINT 5MILx20MIL" SMT_TP_5milx20mil#4 14.394,7.704 r90 top
TP10 "TEST POINT 5MILx20MIL" SMT_TP_5milx20mil#5 15.244,8.01 r90 top
TP11 "TEST POINT 5MILx20MIL" SMT_TP_5milx20mil#6 14.484,8.254 r90 top
U1 "Bluetooth low energy and 2.4GHz proprietary SoC" QFN40P600X600X90-48N 17.012,3.429 r270 top
U2 "32.768kHz 12.5pF 20ppm 80kOhm XTAL" ECX-12 22.053,4.222 r90 top
U3 "CRYSTAL 16MHZ 8PF SMD" NX2520SA 21.904,-1.096 r0 top
U7 "Accelerometer LIS2DHTR" LGA14N 11.734,8.544 r180 top

## Footprints (in the part's own frame and the unit in brackets; to place one, negate y for a bottom-side part, rotate by r counter-clockwise, add the part's x,y. Pads: shape width x height; smd on the part's side, far side on the other; paste and mask are expansions set on the pad)
BATT_NEG [mm]
  round 0.8 smd far side paste-5: 1(-0.051,0.559) 2(2.261,0.584)
  oval 1x2 / inner oval 1x2 / far side oval 0.65x1.6 hole 0.4 slot 1.4 at 90 deg: 1(0,0) 2(2.2,0)
  oval 0.8x1.9 smd far side paste-5: 1(0.102,0) 2(2.108,0.025)
  body extent -0.16,-0.61 2.34,6.74, height 1.1
BATT_POS_SPUTNIK [mm]
  oval 1.5x1 hole 0.7: 1(-1.4,0) 2(1.4,0)
  rrect50% 1.2x0.5 smd paste-99 mask+0.05: 1(-1,-0.354) 2(1,-0.354)
  body extent -1.47,-0.95 1.43,0.5, height 0.2
CAPC0201(0603)_N [mm]
  rect 0.35x0.3 smd: 1(-0.325,0) 2(0.325,0)
  silkscreen extent -0.64,-0.3 0.64,0.3, body extent -0.43,-0.13 0.43,0.13, height 0.23
CAPC0402(1005)_N [mm]
  rect 0.525x0.5 smd: 1(-0.525,0) 2(0.525,0)
  silkscreen extent -0.94,-0.41 0.94,0.41, body extent -0.53,-0.27 0.53,0.28, height 0.35
CAPC0603(1608)_N [mm]
  rect 0.8x0.9 smd: 1(-0.75,0) 2(0.75,0)
  silkscreen extent -1.32,-0.61 1.32,0.61, body extent -0.88,-0.47 0.87,0.47, height 0.9
ECX-12 [mm]
  rect 0.7x1.4 smd: 1(-0.75,0) 2(0.75,0)
  silkscreen extent -1.27,-0.86 1.27,0.86, body extent -1.19,-0.75 1.19,0.81, height 0.6
INDC0402(1005)_N [mm]
  rect 0.525x0.5 smd: 1(-0.525,0) 2(0.525,0)
  silkscreen extent -0.94,-0.41 0.94,0.41, body extent -0.53,-0.27 0.53,0.28, height 0.35
INDC0603(1608)_N [mm]
  rect 0.8x0.9 smd: 1(-0.75,0) 2(0.75,0)
  silkscreen extent -1.32,-0.61 1.32,0.61, body extent -0.88,-0.48 0.87,0.48, height 0.9
LEDC0603(1608)_N [mm]
  rect 0.8x0.9 smd: 1(-0.75,0) 2(0.75,0)
  silkscreen extent -1.02,-0.61 1.02,0.61, body extent -0.88,-0.48 0.87,0.48, height 0.45
LGA14N [mm] "LGA, 14-Leads, Body 2.0x2.0mm (max), Pitch 0.35mm, IPC Medium Density"
  rect 0.675x0.2 smd mask+0.025: 1(-0.962,0.525) 2(-0.962,0.175) 3(-0.962,-0.175) 4(-0.962,-0.525) 8(0.962,-0.525) 9(0.962,-0.175) 10(0.962,0.175) 11(0.962,0.525)
  rect 0.2x0.675 smd mask+0.025: 5(-0.35,-0.962) 6(0,-0.962) 7(0.35,-0.962) 12(0.35,0.962) 13(0,0.962) 14(-0.35,0.962)
  silkscreen extent -1.48,-1.49 1.49,1.5, body extent -1,-1 1,1, height 0.8
NORDIC_MEAND [mil] "Nordic Meandering Ant per PCB400003"
  rect 50x10 smd paste-10 mask-10: 1(75.88,-29.58)
  L1_TOP lines w10: -13.62,367.75 -73.7,367.75 -73.7,293.75 43.19,293.75 43.19,216.75 -73.7,216.75 -73.7,138.75 42.19,138.75 42.19,57.75 -73.7,57.75 -73.7,-29.57 75.88,-29.57 92.69,-29.57 94.64,-29.57 94.71,-29.57 ; 101.3,-29.57 96.09,-29.57 95.87,-29.57 95.45,-29.57 95.22,-29.57 94.71,-29.57 ; 94.71,-29.57 94.71,-29.57
NX2520SA [mm]
  rect 1.2x1 smd: 1(-0.85,-0.7) 2(0.85,-0.7) 3(0.85,0.7) 4(-0.85,0.7)
  silkscreen extent -1.61,-1.35 1.61,1.36, body extent -1.26,-1 1.25,1, height 0.5
PTS530 [mm] "SPST Tact Switch"
  rect 1x0.9 smd: 1(-1.925,1.95) 2(1.925,1.95) 3(-1.925,-1.95) 4(1.925,-1.95)
  silkscreen extent -2.63,-2.62 2.64,2.62, body extent -2.31,-2.24 2.34,2.26, height 0.55
QFN40P600X600X90-48N [mm]
  oval 0.65x0.2 smd: 1(-3.025,2.2) 2(-3.025,1.8) 3(-3.025,1.4) 4(-3.025,1) 5(-3.025,0.6) 6(-3.025,0.2) 7(-3.025,-0.2) 8(-3.025,-0.6) 9(-3.025,-1) 10(-3.025,-1.4) 11(-3.025,-1.8) 12(-3.025,-2.2) 25(3.025,-2.2) 26(3.025,-1.8) 27(3.025,-1.4) 28(3.025,-1) 29(3.025,-0.6) 30(3.025,-0.2) 31(3.025,0.2) 32(3.025,0.6) 33(3.025,1) 34(3.025,1.4) 35(3.025,1.8) 36(3.025,2.2)
  oval 0.2x0.65 smd: 13(-2.2,-3.025) 14(-1.8,-3.025) 15(-1.4,-3.025) 16(-1,-3.025) 17(-0.6,-3.025) 18(-0.2,-3.025) 19(0.2,-3.025) 20(0.6,-3.025) 21(1,-3.025) 22(1.4,-3.025) 23(1.8,-3.025) 24(2.2,-3.025) 37(2.2,3.025) 38(1.8,3.025) 39(1.4,3.025) 40(1,3.025) 41(0.6,3.025) 42(0.2,3.025) 43(-0.2,3.025) 44(-0.6,3.025) 45(-1,3.025) 46(-1.4,3.025) 47(-1.8,3.025) 48(-2.2,3.025)
  rect 4.7x4.7 smd: 49(0,0)
  silkscreen extent -3.51,-3 3,3, body extent -3,-3 3,3, height 0.9
RESC0201(0603)_N [mm]
  rect 0.35x0.3 smd: 1(-0.325,0) 2(0.325,0)
  silkscreen extent -0.64,-0.3 0.64,0.3, body extent -0.43,-0.13 0.43,0.13, height 0.23
RESC0402(1005)_N [mm]
  rect 0.525x0.5 smd: 1(-0.525,0) 2(0.525,0)
  silkscreen extent -0.94,-0.41 0.94,0.41, body extent -0.53,-0.27 0.53,0.28, height 0.35
SMT_TP_5milx20mil#1 [mil] "Test Point Pad"
  rect 5x20 smd paste-196.85: 1(0.37,0)
SMT_TP_5milx20mil#2 [mil] "Test Point Pad"
  rect 5x20 smd rot 45 paste-196.85: 1(0,0.2)
SMT_TP_5milx20mil#3 [mil] "Test Point Pad"
  rect 5x20 smd paste-196.85: 1(1.5,-4.21)
SMT_TP_5milx20mil#4 [mil] "Test Point Pad"
  rect 5x20 smd paste-196.85: 1(2.05,-3.56)
SMT_TP_5milx20mil#5 [mil] "Test Point Pad"
  rect 5x20 smd paste-196.85: 1(0,0.91)
SMT_TP_5milx20mil#6 [mil] "Test Point Pad"
  rect 5x20 smd paste-196.85: 1(0.54,0)
SMT_TP_12MIL [mil] "Test Point Pad"
  round 12 smd: 1(0,0)
SMT_TP_p767mm [mm] "Test Point Pad"
  round 0.787 smd far side paste-5: 1(0,-0.02)
SMT_TP_P767MM [mm] "Test Point Pad"
  round 0.787 smd paste-5: 1(0,0)
TAG_CONNECT_10P [mm]
  round 0.787 smd paste-5: 1(0,0) 2(1.27,0) 3(2.54,0) 4(3.81,0) 5(5.08,0) 6(5.08,1.27) 7(3.81,1.27) 8(2.54,1.27) 9(1.27,1.27) 10(0,1.27)
  round 0.991 hole 0.991 unplated mask-10: 11(-1.27,0.635) 12(6.35,1.65) 13(6.35,-0.38)
  round 1.2 on Bottom Solder mask-10: ""(-1.27,0.635) ""(6.35,1.642) ""(6.35,-0.388)
  round 1.2 on Top Solder mask-10: ""(-1.27,0.635) ""(6.35,1.642) ""(6.35,-0.388)
  silkscreen extent -0.19,-0.8 0.18,-0.61